# Altium PCB WiFi-GPRS_Combo.PcbDoc (part 1 of 2)
Units mm, origin at the board's own origin, x right, y up, seen from the top; angles counter-clockwise.
Board outline 65 x 50 mm, 2 copper layers (Top Layer, Bottom Layer); 80 components, 60 nets, 371 pads, 8 vias.
Unrouted connection lines stored in the file: 169.
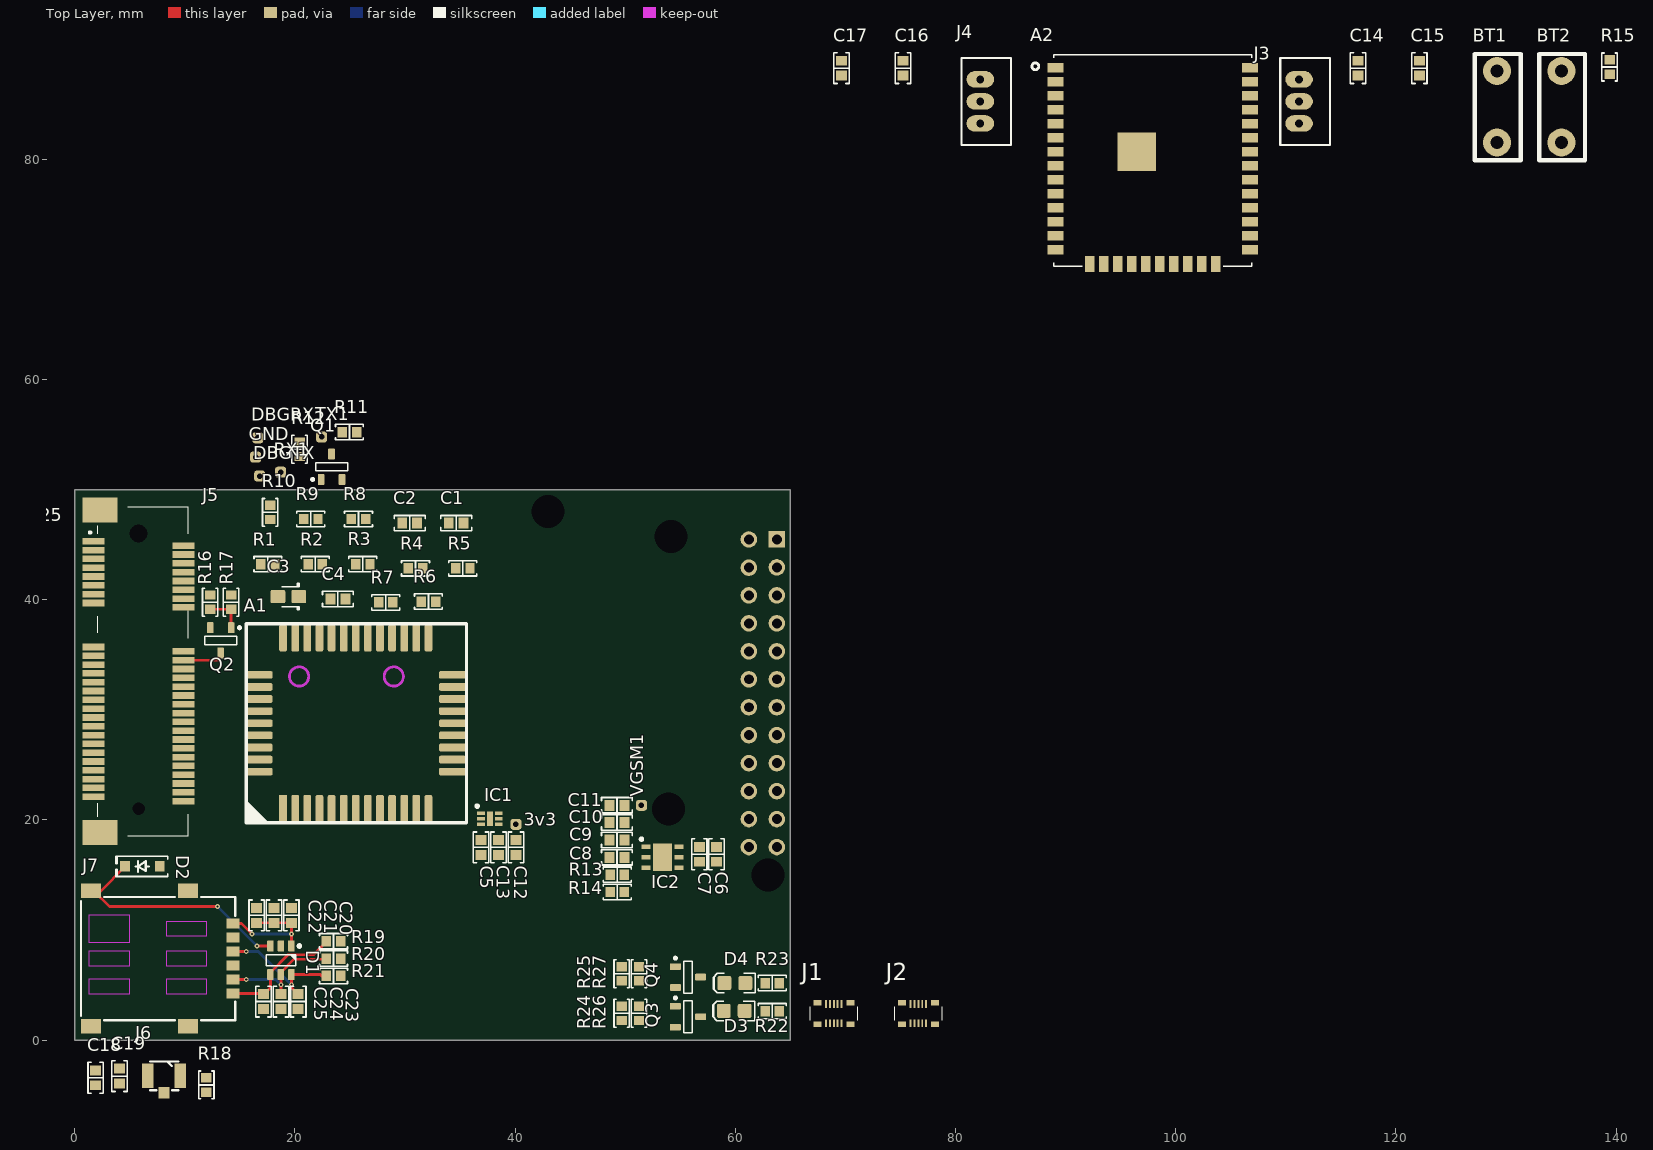
[diagram p0: Top Layer view]
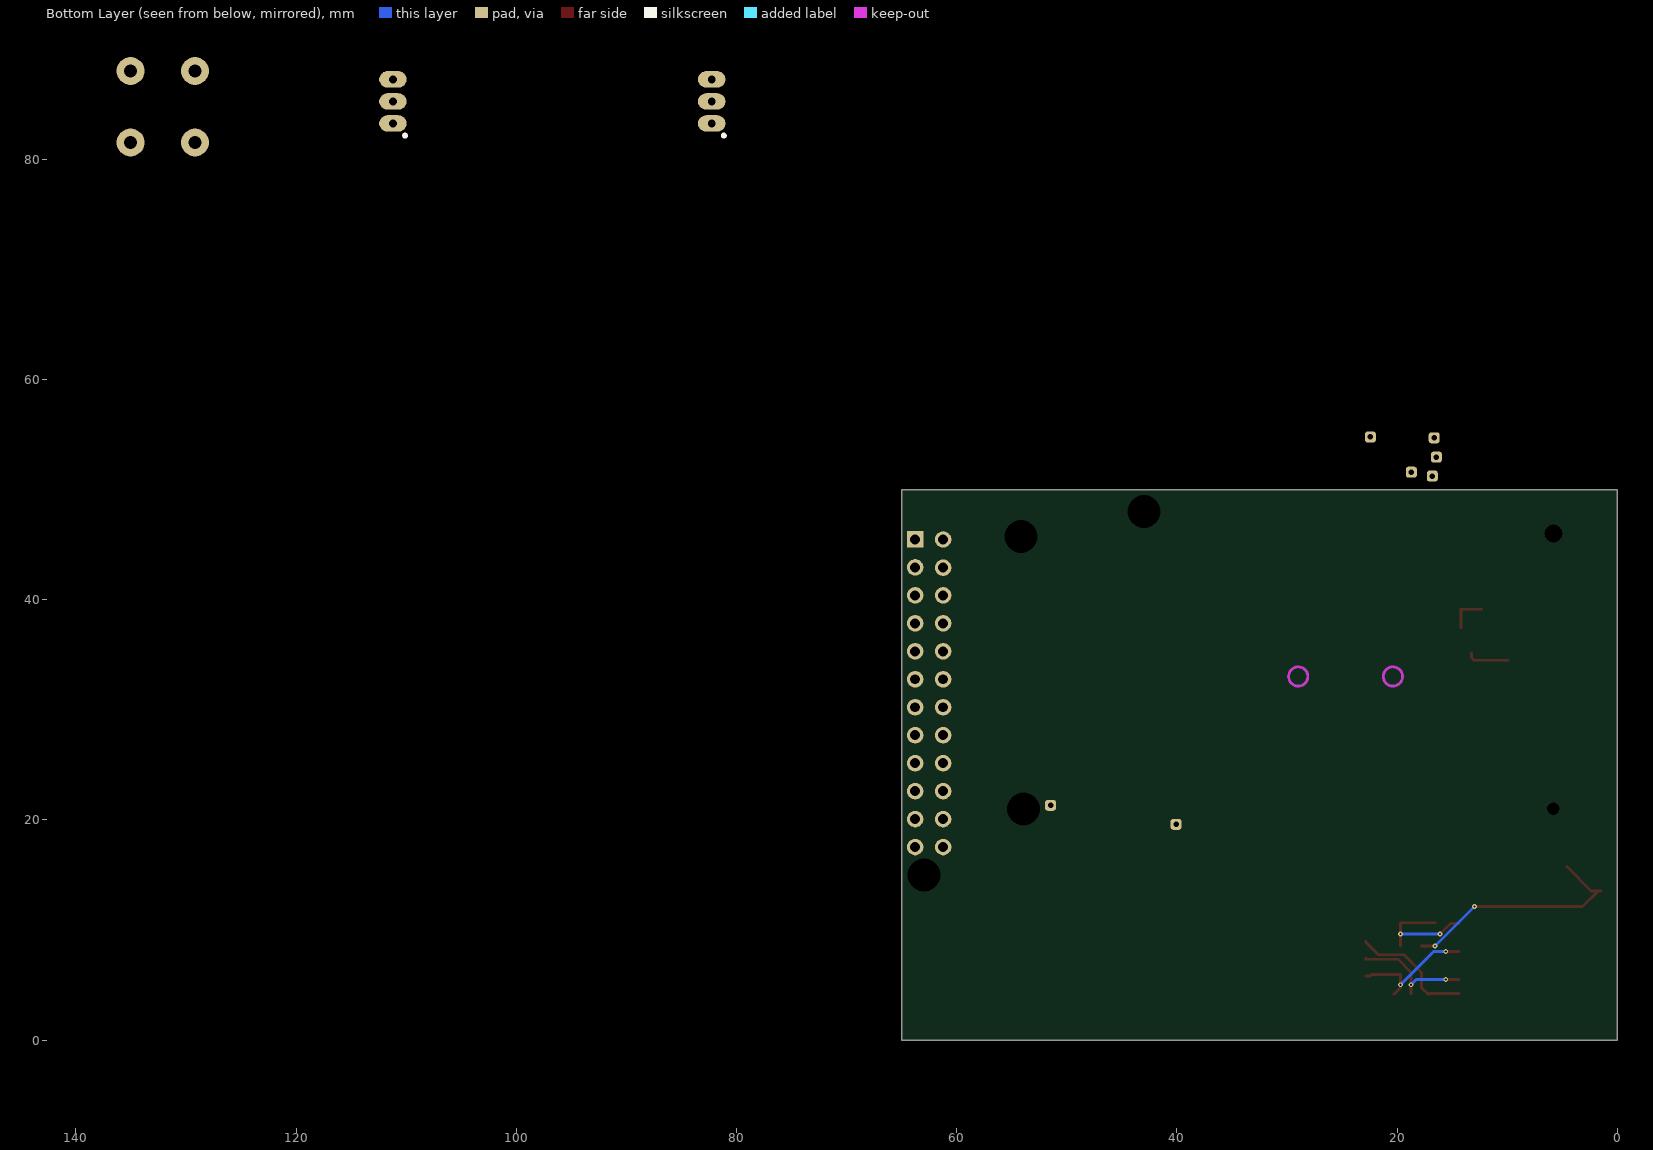
[diagram p1: Bottom Layer view, seen from below]

## Layer stack, top to bottom
Top Solder: solder mask 0.0102, Solder Resist, Dk 3.5
Top Layer: signal copper 0.0356
Dielectric 1: dielectric 0.32, FR-4, Dk 4.8
Bottom Layer: signal copper 0.0356
Bottom Solder: solder mask 0.0102, Solder Resist, Dk 3.5

## Board outline
0,0 65,0 65,50 0,50

## Design rules (kind name [scope] priority, off if disabled: settings)
Clearance [All] p1: gap=0.089 ignorepadtopadclearanceinfootprint=FALSE
Height [All] p1: minheight=0 maxheight=25.4 prefheight=0
PolygonConnect [All] p1: connectstyle=Relief reliefconductorwidth=0.254 reliefentries=4 polygonreliefangle="90 Angle" airgapwidth=0.254
RoomDefinition U_Expansition [InComponentClass('U_Expansition')] p1: confinementstyle=ConfineIn formatcopy=TRUE lockcomponents=FALSE outline 65.6,0 79.976,0 79.976,7.35 65.6,7.35
RoomDefinition U_WiFi-BLE [InComponentClass('U_WiFi-BLE')] p2: confinementstyle=ConfineIn formatcopy=TRUE lockcomponents=FALSE outline 68.722,69.324 143.076,69.324 143.076,92.45 68.722,92.45
RoomDefinition U_SimCard [InComponentClass('U_SimCard')] p3: confinementstyle=ConfineIn formatcopy=TRUE lockcomponents=FALSE outline 0,0.025 65,0.025 65,17.35 0,17.35
RoomDefinition U_Power [InComponentClass('U_Power')] p4: confinementstyle=ConfineIn formatcopy=TRUE lockcomponents=FALSE outline 35.373,12.45 61.23,12.45 61.23,22.675 35.373,22.675
RoomDefinition U_LTE [InComponentClass('U_LTE')] p5: confinementstyle=ConfineIn formatcopy=TRUE lockcomponents=FALSE outline 0.075,17.025 15.3,17.025 15.3,57.875 0.075,57.875
RoomDefinition U_GPRS [InComponentClass('U_GPRS')] p6: confinementstyle=ConfineIn formatcopy=TRUE lockcomponents=FALSE outline 15.3,17.925 41.325,17.925 41.325,56.225 15.3,56.225
RoutingVias [All] p1: holewidth=0.711 width=1.27 viastyle="Through Hole" minholewidth=0.711 minwidth=1.27 maxholewidth=0.711 maxwidth=1.27
SolderMaskExpansion [All] p1: expansion=0.102
Width "Schematic Width Constraint" [InNet('Vgsm')] p1: maxlimit=3 minlimit=0.5 preferedwidth=0.5
Width [All] p2: maxlimit=0.254 minlimit=0.254 preferedwidth=0.254
29 further rules are at their usual default settings.

## Classes and differential pairs
component class U_SimCard: C18 C19 C20 C21 C22 C23 C24 C25 D1 D2 D3 D4 J6 J7 Q3 Q4 R18 R19 R20 R21 R22 R23 R24 R25 R26 R27
component class U_LTE: J5 Q2 R16 R17
net class Vgsm: Vgsm
net class "SIM CARD": CLK DATA RST SIM_CLK SIM_DATA SIM_RST SIMVCC
net class "GSM ANT": ANT NetC19_2
component class U_WiFi-BLE: A2 BT1 BT2 C14 C15 C16 C17 J3 J4 R15
component class U_Power: 3v3 C5 C6 C7 C8 C9 C10 C11 C12 C13 IC1 IC2 R13 R14 VGSM1
component class U_GPRS: A1 C1 C2 C3 C4 DBGRX DBGTX GND Q1 R1 R2 R3 R4 R5 R6 R7 R8 R9 R10 R11 R12 RX1 TX1
component class U_Expansition: J1 J2

## Components (designator, comment, footprint, x,y, rotation, side; value= is the part's Value field where it differs from the comment)
3v3 "Test Point" TestPoint 40.075,19.6 r90 top
A1 "#NAME?" "QUECTEL - M66" 25.525,28.775 r90 top
A2 "ESP32-WROOM-32U(16MB)" ESP32-WROOM-32U 97.898,79.9 r0 top
BT1 "#NAME?" "TACT-SWITCH-BUTTON 2 PIN" 129.175,84.775 r0 top value=Button
BT2 "#NAME?" "TACT-SWITCH-BUTTON 2 PIN" 135.025,84.775 r0 top value=Button
C1 "10pF" "CAP 0603/1608" 34.649,46.95 r180 top
C2 "33pF" "CAP 0603/1608" 30.423,46.95 r180 top
C3 "100uF" "CAP POL 2012X150USR" 19.4,40.275 r180 top
C4 "100nF" "CAP 0603/1608" 23.9,40.05 r180 top
C5 "1uF" "CAP 0603/1608" 36.9,17.5 r90 top
C6 "10uF" "CAP 0603/1608" 58.3,16.875 r90 top
C7 "10uF" "CAP 0603/1608" 56.725,16.875 r90 top
C8 "470nF" "CAP 0603/1608" 49.25,16.6 r0 top
C9 "10uF" "CAP 0603/1608" 49.25,18.175 r0 top
C10 "22uF" "CAP 0603/1608" 49.25,19.75 r0 top
C11 "22uF" "CAP 0603/1608" 49.25,21.325 r0 top
C12 "100nF" "CAP 0603/1608" 40.075,17.5 r90 top
C13 "1uF" "CAP 0603/1608" 38.5,17.5 r90 top
C14 "100nF" "CAP 0603/1608" 116.549,88.275 r90 top
C15 "100nF" "CAP 0603/1608" 122.125,88.275 r90 top
C16 "47uF" "CAP 0603/1608" 75.222,88.275 r90 top
C17 "100nF" "CAP 0603/1608" 69.647,88.275 r90 top
C18 "Capacitance" "CAP 0603/1608" 1.9,-3.425 r90 top
C19 "Capacitance" "CAP 0603/1608" 4.075,-3.275 r90 top
C20 "1uF" "CAP 0603/1608" 19.675,11.325 r270 top
C21 "33pF" "CAP 0603/1608" 18.1,11.325 r270 top
C22 "100nF" "CAP 0603/1608" 16.525,11.325 r270 top
C23 "33pF" "CAP 0603/1608" 20.3,3.5 r90 top
C24 "33pF" "CAP 0603/1608" 18.725,3.5 r90 top
C25 "33pF" "CAP 0603/1608" 17.15,3.5 r90 top
D1 "#NAME?" SOT23-6 18.725,7.25 r270 top
D2 "#NAME?" SOD-123 6.15,15.775 r180 top
D3 "#NAME?" LED-0805-A 59.9,2.65 r180 top
D4 "#NAME?" LED-0805-A 59.95,5.175 r180 top
DBGRX "Test Point" TestPoint 16.625,54.7 r90 top (schematic designator DBGRX1)
DBGTX "Test Point" TestPoint 16.8,51.225 r90 top (schematic designator DBGTX1)
GND "Test Point" TestPoint 16.423,52.95 r90 top (schematic designator GND1)
IC1 "#NAME?" "MICREL MLF-6 1.6x1.6MM" 37.7,20.1 r0 top
IC2 "#NAME?" "ST DFN-6 3x3mm" 53.375,16.6 r0 top
J1 "#NAME?" "HIROSE BM2410DP" 68.95,2.4 r0 top
J2 "#NAME?" "HIROSE BM2410DP" 76.625,2.4 r0 top
J3 "Header" "JST B3B-PH-K" 111.199,85.25 r90 top
J4 "Header" "JST B3B-PH-K" 82.248,85.25 r90 top
J5 "#NAME?" "TE 1775862-2" 5.8,33.5 r270 top
J6 "#NAME?" "TE C-1909763" 8.125,-3.25 r0 top
J7 "#NAME?" "GCT SIM8060-6-1-14-00-A" 7.575,7.4 r270 top
Q1 "#NAME?" SOT23-3 23.325,52.125 r0 top
Q2 "#NAME?" SOT23-3 13.25,36.25 r180 top
Q3 "#NAME?" SOT23-3 55.75,2.125 r270 top
Q4 "#NAME?" SOT23-3 55.75,5.725 r270 top
R1 "10kR" "RES 0603/1608" 17.545,43.225 r180 top
R2 "10kR" "RES 0603/1608" 21.845,43.225 r180 top
R3 "10kR" "RES 0603/1608" 26.171,43.225 r180 top
R4 "10kR" "RES 0603/1608" 30.946,42.85 r180 top
R5 "10kR" "RES 0603/1608" 35.246,42.85 r180 top
R6 "10kR" "RES 0603/1608" 32.125,39.825 r180 top
R7 "10kR" "RES 0603/1608" 28.25,39.75 r180 top
R8 "5.6kR" "RES 0603/1608" 25.773,47.325 r180 top
R9 "5.6kR" "RES 0603/1608" 21.448,47.325 r180 top
R10 "5.6kR" "RES 0603/1608" 17.748,47.925 r270 top
R11 "1kR" "RES 0603/1608" 24.95,55.225 r0 top
R12 "10kR" "RES 0603/1608" 20.425,53.65 r90 top
R13 "66.5kR" "RES 0603/1608" 49.275,15.025 r180 top
R14 "10kR" "RES 0603/1608" 49.275,13.45 r180 top
R15 "10kR" "RES 0603/1608" 139.4,88.375 r90 top
R16 "1kR" "RES 0603/1608" 12.3,39.775 r90 top
R17 "10kR" "RES 0603/1608" 14.2,39.775 r270 top
R18 "0mR" "RES 0603/1608" 11.95,-4.075 r90 top
R19 "22R" "RES 0603/1608" 23.5,8.975 r0 top
R20 "22R" "RES 0603/1608" 23.5,7.4 r0 top
R21 "22R" "RES 0603/1608" 23.5,5.825 r0 top
R22 "91R" "RES 0603/1608" 63.35,2.625 r0 top
R23 "91R" "RES 0603/1608" 63.35,5.175 r0 top
R24 "1kR" "RES 0603/1608" 49.675,2.425 r270 top
R25 "1kR" "RES 0603/1608" 49.675,6.025 r270 top
R26 "10kR" "RES 0603/1608" 51.25,2.425 r90 top
R27 "10kR" "RES 0603/1608" 51.25,6.025 r90 top
RX1 "Test Point" TestPoint 18.7,51.575 r90 top
TX1 "Test Point" TestPoint 22.425,54.775 r90 top
VGSM1 "Test Point" TestPoint 51.475,21.325 r90 top

## Footprints (in the part's own frame and the unit in brackets; to place one, negate y for a bottom-side part, rotate by r counter-clockwise, add the part's x,y. Pads: shape width x height; smd on the part's side, far side on the other; paste and mask are expansions set on the pad)
"CAP 0603/1608" [mm] "Chip Capacitor, 2-Leads, Body 1.60x0.80mm, IPC Medium Density"
  rect 0.9x1 smd: 1(-0.675,0) 2(0.675,0)
  silkscreen extent -1.4,-0.7 1.4,0.7, body extent -0.8,-0.41 0.8,0.41, height 0.82
"CAP POL 2012X150USR" [mm] "Molded body capacitor, Body 2.0x1.2mm, 0805, IPC Medium Density"
  round 0.254 on Mech14: 0(0,0)
  rrect25% 1.35x1.2 smd: 1(-0.95,0) 2(0.95,0)
  Top Layer pour cut-out: -0.4,0.8 0.4,0.8 0.4,-0.8 -0.4,-0.8
  silkscreen extent -1,-1.2 0.6,1.2, body extent -1.02,-0.67 1.03,0.68, height 1.5
ESP32-WROOM-32U [mm]
  rect 1.45x0.86 smd: 1(-8.83,8.41) 2(-8.83,7.14) 3(-8.83,5.87) 4(-8.83,4.6) 5(-8.83,3.33) 6(-8.83,2.06) 7(-8.83,0.79) 8(-8.83,-0.48) 9(-8.83,-1.75) 10(-8.83,-3.02) 11(-8.83,-4.29) 12(-8.83,-5.56) 13(-8.83,-6.83) 14(-8.83,-8.1) 25(8.83,-8.1) 26(8.83,-6.83) 27(8.83,-5.56) 28(8.83,-4.29) 29(8.83,-3.02) 30(8.83,-1.75) 31(8.83,-0.48) 32(8.83,0.79) 33(8.83,2.06) 34(8.83,3.33) 35(8.83,4.6) 36(8.83,5.87) 37(8.83,7.14) 38(8.83,8.41)
  rect 0.86x1.45 smd: 15(-5.715,-9.43) 16(-4.445,-9.43) 17(-3.175,-9.43) 18(-1.905,-9.43) 19(-0.635,-9.43) 20(0.635,-9.43) 21(1.905,-9.43) 22(3.175,-9.43) 23(4.445,-9.43) 24(5.715,-9.43)
  rect 3.5x3.5 smd: 39(-1.46,0.77)
  silkscreen extent -10.96,-9.6 9,9.6, body extent -9,-9.6 9,9.6, height 3.3
"GCT SIM8060-6-1-14-00-A" [mm] "6 Position Card Connector NANO SIM Surface Mount, Right Angle Gold"
  rect 0.9x1.2 smd: C1(-3.175,6.8) C2(-0.635,6.8) C3(1.905,6.8) C5(-1.905,6.8) C6(0.635,6.8) C7(3.175,6.8)
  rect 1.3x1.8 smd: S(-6.15,2.7) S(6.15,2.7) S(6.15,-6.1) SW(-6.15,-6.1)
  Top Layer keep-out region: -3.36,0.72 -2.06,0.72 -2.06,4.42 -3.36,4.42
  Top Layer keep-out region: -0.65,0.72 0.65,0.72 0.65,4.42 -0.65,4.42
  Top Layer keep-out region: 1.89,0.72 3.19,0.72 3.19,4.42 1.89,4.42
  Top Layer keep-out region: 1.89,-6.3 3.19,-6.3 3.19,-2.6 1.89,-2.6
  Top Layer keep-out region: -0.65,-6.3 0.65,-6.3 0.65,-2.6 -0.65,-2.6
  Top Layer keep-out region: -3.93,-6.3 -1.49,-6.3 -1.49,-2.6 -3.93,-2.6
  silkscreen extent -5.6,-7 5.6,7, body extent -6.2,-7 6.2,7.1, height 1.4
"HIROSE BM2410DP" [mm]
  rect 0.18x0.69 smd: 1(-0.7,-0.875) 2(-0.7,0.875) 3(-0.35,-0.875) 4(-0.35,0.875) 5(0,-0.875) 6(0,0.875) 7(0.35,-0.875) 8(0.35,0.875) 9(0.7,-0.875) 10(0.7,0.875)
  rect 0.73x0.49 smd: MP1(-1.5,-0.975) MP2(-1.5,0.975) MP3(1.5,-0.975) MP4(1.5,0.975)
  silkscreen extent -2.16,-0.61 2.16,0.61, body extent -2.16,-1.02 2.16,1, height 0.64
"JST B3B-PH-K" [mm]
  oval 1.5x2.5 hole 0.7: 1(-2,0) 2(0,0) 3(2,0)
  silkscreen extent -3.95,-2.8 3.95,1.7, body extent -3.95,-2.8 3.95,1.7, height 6
LED-0805-A [mil]
  round 20 on Mech14: 0(0,0)
  rrect25% 50x50 smd: A(-37.5,0) K(37.5,0)
  Top Layer pour cut-out: -15,30 15,30 15,-30 -15,-30
  silkscreen extent -72,-35 77,35, body extent -39,-25 39,25, height 31
"MICREL MLF-6 1.6x1.6MM" [mm] "6-UFDFN Exposed Pad, 6-TMLF®"
  rect 0.7x0.3 smd: 1(-0.8,0.5) 2(-0.8,0) 3(-0.8,-0.5) 4(0.8,-0.5) 5(0.8,0) 6(0.8,0.5)
  rect 0.55x1.31 smd: 7(0,0)
  silkscreen extent -1.27,1.03 -1.02,1.27, body extent -0.85,-0.8 0.85,0.8, height 0.6
"QUECTEL - M66" [mm]
  rect 2.5x0.7 smd: 1(-7.75,6.6)
  rrect50% 2.5x0.7 smd: 2(-7.75,5.5) 3(-7.75,4.4) 4(-7.75,3.3) 5(-7.75,2.2) 6(-7.75,1.1) 7(-7.75,0) 8(-7.75,-1.1) 9(-7.75,-2.2) 10(-7.75,-3.3) 11(-7.75,-4.4) 12(-7.75,-5.5) 13(-7.75,-6.6) 23(7.75,-6.6) 24(7.75,-5.5) 25(7.75,-4.4) 26(7.75,-3.3) 27(7.75,-2.2) 28(7.75,-1.1) 29(7.75,0) 30(7.75,1.1) 31(7.75,2.2) 32(7.75,3.3) 33(7.75,4.4) 34(7.75,5.5) 35(7.75,6.6)
  rrect50% 0.7x2.5 smd: 14(-4.4,-8.8) 15(-3.3,-8.8) 16(-2.2,-8.8) 17(-1.1,-8.8) 18(0,-8.8) 19(1.1,-8.8) 20(2.2,-8.8) 21(3.3,-8.8) 22(4.4,-8.8) 36(4.4,8.8) 37(3.3,8.8) 38(2.2,8.8) 39(1.1,8.8) 40(0,8.8) 41(-1.1,8.8) 42(-2.2,8.8) 43(-3.3,8.8) 44(-4.4,8.8)
  Keep-Out Layer circle w0.254: c4.25,-3.45 r0.875
  Keep-Out Layer circle w0.254: c4.25,5.15 r0.875
  silkscreen extent -9.05,-10.05 9.05,9.95, body extent -7.9,-8.8 7.9,8.9, height 2.3
"RES 0603/1608" [mm] "Chip Resistor, 2-Leads, Body 1.60x0.80mm, IPC Medium Density"
  rect 0.85x0.95 smd: 1(-0.65,0) 2(0.65,0)
  silkscreen extent -1.27,-0.7 1.27,0.7, body extent -0.8,-0.4 0.8,0.4, height 0.45
SOD-123 [mm] "SOD, 2-Leads, Body 1.55x3.70mm, IPC Medium Density"
  rect 0.9x0.95 smd: 1(-1.575,0) 2(1.575,0)
  silkscreen extent -2.3,-0.92 2.41,0.92, body extent -1.86,-0.78 1.86,0.77, height 1.35
SOT23-3 [mm] "SOT23, 3 pin"
  rrect25% 0.6x1 smd: 1(-0.95,-1.2) 2(0.95,-1.2) 3(0,1.1)
  silkscreen extent -1.81,-1.3 1.45,0.33, body extent -1.45,-1.45 1.45,1.35, height 1.29
SOT23-6 [mm]
  round 0.5 on Mech14: 0(0,0)
  rrect25% 1x0.6 smd: 1(-1.3,0.95) 2(-1.3,0) 3(-1.3,-0.95) 4(1.3,-0.95) 5(1.3,0) 6(1.3,0.95)
  silkscreen extent -1.42,-1.35 0.51,1.81, body extent -1.4,-1.45 1.4,1.45, height 1.44
"ST DFN-6 3x3mm" [mm] "DFN6 (3 x 3 mm)"
  rect 0.8x0.4 smd: 1(-1.5,0.95) 2(-1.5,0) 3(-1.5,-0.95) 4(1.5,-0.95) 5(1.5,0) 6(1.5,0.95)
  rect 1.75x2.5 smd: 7(0,0)
  silkscreen extent -2.02,1.53 -1.77,1.77, body extent -1.55,-1.5 1.55,1.5, height 1
"TACT-SWITCH-BUTTON 2 PIN" [mm]
  round 2.54 / inner round 1.2 / far side round 2.54 hole 1.2: 1(0,-3.25) 2(0,3.25)
  silkscreen extent -2.02,-4.86 2.15,4.79, body extent -1.4,-3.1 1.6,2.9, height 4.26
"TE 1775862-2" [mm] "PCI-E MINI CARD CONNECTOR"
  rect 0.6x2 smd: 1(-11.8,-4.1) 2(-11.4,4.1) 3(-11,-4.1) 4(-10.6,4.1) 5(-10.2,-4.1) 6(-9.8,4.1) 7(-9.4,-4.1) 8(-9,4.1) 9(-8.6,-4.1) 10(-8.2,4.1) 11(-7.8,-4.1) 12(-7.4,4.1) 13(-7,-4.1) 14(-6.6,4.1) 15(-6.2,-4.1) 16(-5.8,4.1) 17(-2.2,-4.1) 18(-1.8,4.1) 19(-1.4,-4.1) 20(-1,4.1) 21(-0.6,-4.1) 22(-0.2,4.1) 23(0.2,-4.1) 24(0.6,4.1) 25(1,-4.1) 26(1.4,4.1) 27(1.8,-4.1) 28(2.2,4.1) 29(2.6,-4.1) 30(3,4.1) 31(3.4,-4.1) 32(3.8,4.1) 33(4.2,-4.1) 34(4.6,4.1) 35(5,-4.1) 36(5.4,4.1) 37(5.8,-4.1) 38(6.2,4.1) 39(6.6,-4.1) 40(7,4.1) 41(7.4,-4.1) 42(7.8,4.1) 43(8.2,-4.1) 44(8.6,4.1) 45(9,-4.1) 46(9.4,4.1) 47(9.8,-4.1) 48(10.2,4.1) 49(10.6,-4.1) 50(11,4.1) 51(11.4,-4.1) 52(11.8,4.1)
  round 0.825 hole 1.65: MH1(-12.5,0)
  round 0.575 hole 1.15: MH2(12.5,0)
  rect 2.3x3.2 smd: MP1(-14.65,-3.5) MP2(14.65,-3.5)
  silkscreen extent -14.95,-4.5 14.95,4.5, body extent -14.87,-4.5 15.02,4.58, height 5.19
"TE C-1909763" [mm]
  rect 1.05x2.2 smd: G(-1.475,0) G(1.475,0)
  rect 1x1.05 smd: S(0,-1.525)
  silkscreen extent -1.3,-1.3 1.3,1.3, body extent -1.5,-1.55 1.5,1.55, height 1.23
TestPoint [mm] "Custom Test Point"
  rrect50% 1x1 hole 0.5: 1(0,0)

## Part data
3v3 DBGRX DBGTX GND RX1 TX1 VGSM1: "Custom Test Point"
A1: library part "Qectel M66", "GSM/GPRS Module Series", Case/Package=Module, Current - Receiving=350mA, Frequency="824MHz ~ 960MHz, 1.71GHz ~ 1.99GHz", Manufacturer=QUECTEL, Manufacturer Part Number=M66, Operating Temperature="40°C ~ 85°C", Power - Output=32.2dBm, Supplier Part Number 1=M66DSFA-04-STD, Voltage - Supply=3.8V, Antenna Type="Antenna Not Included", ComponentLink1Description=https://www.u-blox.com/sites/default/files/SARA-G3_DataSheet_%28UBX-13000993%29.pdf?src-supplier=Digi-Key, ComponentLink1URL=https://www.u-blox.com/sites/default/files/SARA-G3_DataSheet_%28UBX-13000993%29.pdf?src-supplier=Digi-Key, Current - Transmitting=350mA, Data Rate=85.6kbps, Pricing 1="1 = 6,27 (USD)", Protocol="2G GPRS, GSM", RF Family/Standard="Cellular, Navigation", RoHS=No, Sensitivity=-109dBm, Serial Interfaces=UART, Stock 1=1144, Supplier 1=empa
A2: library part "ESP ESP32-WROOM-32U", "Wi-Fi/BT BLE Module ESP32-D0WD SPI Flash UART U.FL Conn.", Manufacturer="Espressif Systems", Supplier Part Number 1=1904-1028-1-ND, ComponentLink1Description=https://www.espressif.com/sites/default/files/documentation/esp32-wroom-32d_esp32-wroom-32u_datasheet_en.pdf?src-supplier=Digi-Key, ComponentLink1URL=https://www.espressif.com/sites/default/files/documentation/esp32-wroom-32d_esp32-wroom-32u_datasheet_en.pdf?src-supplier=Digi-Key, Manufacturer Part Number=ESP32-WROOM-32U(16MB), Pricing 1="1 = 4,50000 (USD)", RoHS=No, Stock 1=37, Supplier 1=Digi-Key
BT1 BT2: library part "Tactile Switch", "Button, 2 pin", Birim Fiyat="* USD", Depo Kodu=SW#BUTTON, Satýcý=Digikey
C1: library part "Capacitor - Ceramic", "Ceramic, SMT Capacitor", Case/Package=0603, Case Code (Metric)=1608, Dielectric=C0G, Insulation Resistance=100GR, Manufacturer=Yageo, Manufacturer Part Number=CC0603JRNPO9BN100, Max Operating Temperature=125°C, Min Operating Temperature=-55°C, Package Quantity=1, Supplier Part Number 1=311-1058-1-ND, Temperature Coefficient=30ppm/°C, Tolerance=5%, Voltage=50V, Capacitance=10pF, Case Code (Imperial)=0603, ComponentLink1Description=http://www.farnell.com/datasheets/2213336.pdf?src-supplier=Farnell, ComponentLink1URL=http://www.farnell.com/datasheets/2213336.pdf?src-supplier=Farnell, ComponentLink2Description=https://www.verical.com/server-webapp/html/getDatasheet?partID=403524&src-supplier=Verical, ComponentLink2URL=https://www.verical.com/server-webapp/html/getDatasheet?partID=403524&src-supplier=Verical, ComponentLink3Description=http://www.farnell.com/datasheets/1835847.pdf?src-supplier=Element14, ComponentLink3URL=http://www.farnell.com/datasheets/1835847.pdf?src-supplier=Element14, ComponentLink4Description=http://www.yageo.com/documents/recent/UPY-GP_NP0_16V-to-50V_16.pdf?src-supplier=Digi-Key, ComponentLink4URL=http://www.yageo.com/documents/recent/UPY-GP_NP0_16V-to-50V_16.pdf?src-supplier=Digi-Key, ComponentLink5Description=http://www.farnell.com/datasheets/1734582.pdf?src-supplier=Element14, ComponentLink5URL=http://www.farnell.com/datasheets/1734582.pdf?src-supplier=Element14, ComponentLink6Description=http://www.yageo.com/documents/recent/UPY-GP_NP0_16V-to-50V_8.pdf?src-supplier=Avnet+Europe, ComponentLink6URL=http://www.yageo.com/documents/recent/UPY-GP_NP0_16V-to-50V_8.pdf?src-supplier=Avnet+Europe, ComponentLink7Description=http://www.mouser.com/ds/2/447/Yageo_UPY-GP_NP0_16V-to-50V_9-358835.pdf?src-supplier=Mouser, ComponentLink7URL=http://www.mouser.com/ds/2/447/Yageo_UPY-GP_NP0_16V-to-50V_9-358835.pdf?src-supplier=Mouser, ComponentLink8Description=http://www.farnell.com/datasheets/1132289.pdf?src-supplier=Element14, ComponentLink8URL=http://www.farnell.com/datasheets/1132289.pdf?src-supplier=Element14, Composition=Ceramic, Depth=0.8mm, Height=0.8mm, Lead Free="Lead Free", Length=1.6mm, Mount="Surface Mount", Number of Pins=2, Packaging="Tape and Reel", Pricing 1="1 = 0,10000, 10 = 0,06100, 100 = 0,02730, 500 = 0,01948, 1000 = 0,01530 (USD)", Radiation Hardening=No, REACH SVHC="No SVHC", RoHS=Yes, Stock 1=128799, Supplier 1=Digi-Key, Termination=SMD/SMT, Thickness=0.035inch, Voltage Rating=50V, Voltage Rating (DC)=50V, Width=0.031inch
C2 C21 C23 C24 C25: library part "Capacitor - Ceramic", "Ceramic, SMT Capacitor", Case/Package=Ceramic, Case Code (Imperial)=0603, Case Code (Metric)=1608, Dielectric=C0G, Manufacturer="Walsin Technologies", Manufacturer Part Number=0603N330J500CT, Max Operating Temperature=125°C, Min Operating Temperature=-55°C, Supplier Part Number 1=1292-1645-1-ND, Tolerance=5%, Voltage Rating=50V, Capacitance=33pF, ComponentLink1Description=https://www.verical.com/server-webapp/html/getDatasheet?partID=572322&src-supplier=Verical, ComponentLink1URL=https://www.verical.com/server-webapp/html/getDatasheet?partID=572322&src-supplier=Verical, Depth=0.8mm, Lead Free="Lead Free", Length=1.6mm, Packaging="Tape and Reel", Pricing 1="1 = 0,10000, 10 = 0,03300, 100 = 0,01490, 500 = 0,01062, 1000 = 0,00835 (USD)", Radiation Hardening=No, REACH SVHC=Unknown, RoHS=Yes, Stock 1=411190, Supplier 1=Digi-Key, Voltage Rating (DC)=50V
C3: library part "Capacitor - Tantalum", "Capacitor, Tantalum", Case/Package=1210, Case Code (Metric)=3528, Dielectric Material=Tantalum, ESR (Equivalent Series Resistance)=250mR, Manufacturer="Kyocera AVX", Manufacturer Part Number=TPSB107M006R0250, Max Operating Temperature=125°C, Min Operating Temperature=-55°C, Package Quantity=1, Supplier Part Number 1=478-4978-1-ND, Tolerance=20%, Voltage Rating=6.3V, Capacitance=100uF, Case Code (Imperial)=1210, ComponentLink1Description=http://datasheets.avx.com/TPS.pdf?src-supplier=Digi-Key, ComponentLink1URL=http://datasheets.avx.com/TPS.pdf?src-supplier=Digi-Key, ComponentLink2Description=http://www.avx.com/docs/catalogs/tps.pdf?src-supplier=Avnet, ComponentLink2URL=http://www.avx.com/docs/catalogs/tps.pdf?src-supplier=Avnet, ComponentLink3Description=http://www.avxcorp.com/docs/Catalogs/tps.pdf?src-supplier=Future+Electronics, ComponentLink3URL=http://www.avxcorp.com/docs/Catalogs/tps.pdf?src-supplier=Future+Electronics, ComponentLink4Description=http://www.avx.com/docs/catalogs/tps.pdf?src-supplier=Avnet+Europe, ComponentLink4URL=http://www.avx.com/docs/catalogs/tps.pdf?src-supplier=Avnet+Europe, Depth=2.8mm, Dissipation Factor=10%, Features="General Purpose", Height=2.1mm, Height - Seated (Max)=0.083inch, Lead Free="Lead Free", Length=3.5mm, Mount="Surface Mount", Number of Pins=2, Packaging="Tape and Reel", Polarity=Polar, Pricing 1="1 = 0,65000, 10 = 0,47900, 100 = 0,32840, 500 = 0,25996, 1000 = 0,21891 (USD)", Radiation Hardening=No, RoHS=Yes, Stock 1=22431, Supplier 1=Digi-Key, Termination=SMD/SMT, Voltage Rating (DC)=6.3V, Width=2.8mm
C4 C12 C14 C15 C17 C22: library part "Cap - Ceramic", "Capacitor, Ceramic", Case/Package=0603, Case Code (Metric)=1608, Dielectric=X5R, Manufacturer=Samsung, Manufacturer Part Number=CL10A104KA8NNNC, Max Operating Temperature=85°C, Min Operating Temperature=-55°C, Package Quantity=1, Supplier Part Number 1=1276-1857-1-ND, Tolerance=10%, Voltage Rating=25V, Capacitance=100nF, Case Code (Imperial)=0603, ComponentLink1Description=http://www.samsungsem.com/kr/support/library/product-catalog/mlcc.jsp, ComponentLink1URL=http://www.samsungsem.com/kr/support/library/product-catalog/mlcc.jsp, Contact Plating=Tin, Lead Free="Lead Free", Length=0.063inch, Mount="Surface Mount", Packaging="Tape and Reel", Price=0,1, Pricing 1="1 = 0,10000, 10 = 0,04600, 100 = 0,02070, 500 = 0,01478, 1000 = 0,01162 (USD)", RoHS=Yes, Stock 1=978306, Supplier 1=Digi-Key, Termination=Wraparound, Thickness=0.035inch, Voltage Rating (DC)=25V, Width=0.031inch
C5 C13 C20: library part "Capacitor - Ceramic", "Ceramic, SMT Capacitor", Case/Package=0603, Case Code (Metric)=1608, Dielectric=X5R, Manufacturer=Samsung, Manufacturer Part Number=CL10A105KP8NNNC, Max Operating Temperature=85°C, Min Operating Temperature=-55°C, Package Quantity=1, Supplier Part Number 1=1276-1182-1-ND, Tolerance=10%, Voltage=10V, Capacitance=1uF, Case Code (Imperial)=0603, ComponentLink1Description=https://datasheet.ciiva.com/15195/getdatasheetpartid-358616-15195708.pdf?src-supplier=Verical, ComponentLink1URL=https://datasheet.ciiva.com/15195/getdatasheetpartid-358616-15195708.pdf?src-supplier=Verical, ComponentLink2Description=https://datasheet.ciiva.com/16358/cl05b104kq5nnnc-16358431.pdf?src-supplier=Future+Electronics, ComponentLink2URL=https://datasheet.ciiva.com/16358/cl05b104kq5nnnc-16358431.pdf?src-supplier=Future+Electronics, Contact Plating=Tin, Depth=0.8mm, Height=0.8mm, Length=1.6mm, Mount="Surface Mount", Packaging="Tape and Reel", Pricing 1="1 = 0,10000, 10 = 0,03800, 100 = 0,01680, 500 = 0,01200, 1000 = 0,00943 (USD)", Radiation Hardening=No, RoHS=Yes, Stock 1=4590831, Supplier 1=Digi-Key, Thickness=0.035inch, Voltage Rating=10V, Width=0.031inch
C6 C7 C9: library part "Capacitor - Ceramic", "Ceramic, SMT Capacitor", Case/Package=0603, Case Code (Metric)=1608, Dielectric=X5R, Manufacturer=Samsung, Manufacturer Part Number=CL10A106MQ8NNNC, Max Operating Temperature=85°C, Min Operating Temperature=-55°C, Package Quantity=1, Supplier Part Number 1=1276-1119-1-ND, Tolerance=20%, Voltage=6.3V, Capacitance=10uF, Case Code (Imperial)=0603, ComponentLink1Description=https://datasheet.ciiva.com/25798/cl10a106mq8nnnc-25798320.pdf?src-supplier=Digi-Key, ComponentLink1URL=https://datasheet.ciiva.com/25798/cl10a106mq8nnnc-25798320.pdf?src-supplier=Digi-Key, ComponentLink2Description=https://datasheet.ciiva.com/26838/getdatasheetpartid-357557-26838347.pdf?src-supplier=Verical, ComponentLink2URL=https://datasheet.ciiva.com/26838/getdatasheetpartid-357557-26838347.pdf?src-supplier=Verical, ComponentLink3Description=https://datasheet.ciiva.com/16437/cl05b104kq5nnnc-16437327.pdf?src-supplier=Future+Electronics, ComponentLink3URL=https://datasheet.ciiva.com/16437/cl05b104kq5nnnc-16437327.pdf?src-supplier=Future+Electronics, Contact Plating=Tin, Depth=0.8mm, Height=0.8mm, Length=1.6mm, Mount="Surface Mount", Packaging="Tape and Reel", Pricing 1="1 = 0,15000, 10 = 0,11000, 100 = 0,05150, 500 = 0,03614, 1000 = 0,02992 (USD)", Radiation Hardening=No, RoHS=Yes, Stock 1=4408315, Supplier 1=Digi-Key, Thickness=0.035inch, Voltage Rating=6.3V, Width=0.031inch
C8: library part "Capacitor - Ceramic", "Ceramic, SMT Capacitor", Case/Package=0603, Case Code (Metric)=1608, Manufacturer="Wurth Electronics", Manufacturer Part Number=885012106020, Max Operating Temperature=85°C, Min Operating Temperature=-55°C, Supplier Part Number 1=732-7917-1-ND, Tolerance=20%, Voltage Rating=25V, Capacitance=470nF, Case Code (Imperial)=0603, ComponentLink1Description=https://datasheet.ciiva.com/25798/cl10a106mq8nnnc-25798320.pdf?src-supplier=Digi-Key, ComponentLink1URL=https://datasheet.ciiva.com/25798/cl10a106mq8nnnc-25798320.pdf?src-supplier=Digi-Key, ComponentLink2Description=https://datasheet.ciiva.com/26838/getdatasheetpartid-357557-26838347.pdf?src-supplier=Verical, ComponentLink2URL=https://datasheet.ciiva.com/26838/getdatasheetpartid-357557-26838347.pdf?src-supplier=Verical, ComponentLink3Description=https://datasheet.ciiva.com/16437/cl05b104kq5nnnc-16437327.pdf?src-supplier=Future+Electronics, ComponentLink3URL=https://datasheet.ciiva.com/16437/cl05b104kq5nnnc-16437327.pdf?src-supplier=Future+Electronics, ComponentLink4Description=http://www.farnell.com/datasheets/2031761.pdf?src-supplier=Farnell, ComponentLink4URL=http://www.farnell.com/datasheets/2031761.pdf?src-supplier=Farnell, ComponentLink5Description=https://katalog.we-online.de/pbs/datasheet/885012106020.pdf?src-supplier=Digi-Key, ComponentLink5URL=https://katalog.we-online.de/pbs/datasheet/885012106020.pdf?src-supplier=Digi-Key, ComponentLink6Description=http://www.farnell.com/datasheets/2031761.pdf?src-supplier=Newark, ComponentLink6URL=http://www.farnell.com/datasheets/2031761.pdf?src-supplier=Newark, Length=0.063inch, Mount="Surface Mount", Packaging="Tape and Reel", Pricing 1="1 = 0,10000, 10 = 0,06700, 100 = 0,06040, 500 = 0,05346 (USD)", RoHS=Yes, Stock 1=4756, Supplier 1=Digi-Key, Thickness=0.037inch, Width=0.031inch
C10 C11: library part "Capacitor - Ceramic", "Ceramic, SMT Capacitor", Case/Package=0603, Case Code (Metric)=1608, Dielectric=X5R, Manufacturer=Murata, Manufacturer Part Number=GRM188R60J226MEA0D, Max Operating Temperature=85°C, Min Operating Temperature=-55°C, Package Quantity=4000, Supplier Part Number 1=490-7611-1-ND, Tolerance=20%, Voltage Rating=6.3V, Capacitance=22uF, Case Code (Imperial)=0603, ComponentLink1Description=https://datasheet.ciiva.com/29540/partnumbering-e-01-29540443.pdf?src-supplier=Digi-Key, ComponentLink1URL=https://datasheet.ciiva.com/29540/partnumbering-e-01-29540443.pdf?src-supplier=Digi-Key, ComponentLink2Description=https://datasheet.ciiva.com/29540/partnumbering-e-01-29540441.pdf?src-supplier=Digi-Key, ComponentLink2URL=https://datasheet.ciiva.com/29540/partnumbering-e-01-29540441.pdf?src-supplier=Digi-Key, ComponentLink3Description=https://datasheet.ciiva.com/29540/partnumbering-e-01-29540442.pdf?src-supplier=Digi-Key, ComponentLink3URL=https://datasheet.ciiva.com/29540/partnumbering-e-01-29540442.pdf?src-supplier=Digi-Key, Depth=0.8mm, Height=0.8mm, Lead Free="Lead Free", Length=1.6mm, Mount="Surface Mount", Packaging="Tape and Reel", Pricing 1="1 = 0,26000, 10 = 0,17700, 100 = 0,10010, 500 = 0,07066, 1000 = 0,06182 (USD)", REACH SVHC="No SVHC", RoHS=Yes, Stock 1=6684673, Supplier 1=Digi-Key, Termination=SMD/SMT, Thickness=0.039inch, Voltage Rating (DC)=6.3V, Weight=0.000222oz, Width=0.8mm
C16: library part "Capacitor - Ceramic", "Ceramic, SMT Capacitor", Case/Package=1210, Dielectric=X6S, Manufacturer=Murata, Manufacturer Part Number=GRM32EC81C476KE15K, Supplier Part Number 1=490-16309-1-ND, Tolerance=10%, Voltage Rating (DC)=16V, Capacitance=47uF, ComponentLink1Description=http://www.samsungsem.com/kr/support/product-search/mlcc/CL10A475KO8NNNC.jsp, ComponentLink1URL=http://www.samsungsem.com/kr/support/product-search/mlcc/CL10A475KO8NNNC.jsp, ComponentLink2Description=https://www.verical.com/server-webapp/html/getDatasheet?partID=358619, ComponentLink2URL=https://www.verical.com/server-webapp/html/getDatasheet?partID=358619, ComponentLink3Description=https://produktinfo.conrad.com/datenblaetter/450000-474999/457663-da-01-en-VS_KONDENSATOR_0603.pdf, ComponentLink3URL=https://produktinfo.conrad.com/datenblaetter/450000-474999/457663-da-01-en-VS_KONDENSATOR_0603.pdf, ComponentLink4Description=https://www.yuden.co.jp/productdata/catalog/mlcc01_e.pdf, ComponentLink4URL=https://www.yuden.co.jp/productdata/catalog/mlcc01_e.pdf, ComponentLink5Description=https://www.verical.com/server-webapp/html/getDatasheet?partID=637532, ComponentLink5URL=https://www.verical.com/server-webapp/html/getDatasheet?partID=637532, ComponentLink6Description=http://www.yuden.co.jp/ut/product/category/capacitor/EMK325BJ476MM-T.pdf, ComponentLink6URL=http://www.yuden.co.jp/ut/product/category/capacitor/EMK325BJ476MM-T.pdf, ComponentLink7Description=http://www.farnell.com/datasheets/1693457.pdf, ComponentLink7URL=http://www.farnell.com/datasheets/1693457.pdf, ComponentLink8Description=http://www.mouser.com/ds/2/396/mlcc_all_e-1149778.pdf, ComponentLink8URL=http://www.mouser.com/ds/2/396/mlcc_all_e-1149778.pdf, ComponentLink9Description=http://www.onlinecomponents.com/productFiles/mf-TAI/75emk325bj476mm-t.pdf, ComponentLink9URL=http://www.onlinecomponents.com/productFiles/mf-TAI/75emk325bj476mm-t.pdf, Length=3.2mm, Price=0,78, Pricing 1="1 = 0,78000, 10 = 0,57100, 100 = 0,39170, 500 = 0,31006, 1000 = 0,26110 (USD)", Stock 1=2282, Supplier 1=Digi-Key, Thickness=2.5mm, Width=2.5mm
C18 C19: library part "Capacitor - Ceramic", "Ceramic, SMT Capacitor"
D1: library part "TVS Array 5 ch", "Dual-line Transil™,  transient voltage suppressor (TVS)", Capacitance @ Frequency=-, Current - Peak Pulse (10/1000µs)="7A (8/20µs)", Manufacturer=STMicroelectronics, Manufacturer Part Number=ESDA6V1-5SC6Y, Operating Temperature="-40°C ~ 150°C (TJ)", Package / Case=SOT-23-6, Power - Peak Pulse=80W, Power Line Protection=No, Supplier Part Number 1=497-17311-1-ND, Voltage - Breakdown (Min)=6.1V, Voltage - Clamping (Max) @ Ipp=11.4V, Voltage - Reverse Standoff (Typ)=5.2V, Applications="General Purpose", Category="Circuit Protection", ComponentLink1Description=http://www.st.com/content/ccc/resource/technical/document/datasheet/group3/cf/58/f6/44/dc/90/4f/72/DM00342426/files/DM00342426.pdf/jcr:content/translations/en.DM00342426.pdf, ComponentLink1URL=http://www.st.com/content/ccc/resource/technical/document/datasheet/group3/cf/58/f6/44/dc/90/4f/72/DM00342426/files/DM00342426.pdf/jcr:content/translations/en.DM00342426.pdf, Mounting Type="Surface Mount", Packaging="Cut Tape (CT)", Part Status=Active, Pricing 1="1=0.37, 10=0.3, 100=0.2042, 500=0.15314, 1000=0.11486 (USD)", RoHS="RoHS Compliant", Stock 1=55, Supplier 1=Digi-Key, Supplier Device Package=SOT-23-6, Type=Zener
D2: library part DDZ9678-7, "DIODE ZENER 1.8V 500MW SOD123", Current - Reverse Leakage @ Vr="7.5µA @ 1V", Manufacturer="Diodes Incorporated", Operating Temperature="-65°C ~ 150°C", Package / Case=SOD-123, Power - Max=500mW, Supplier Part Number 1=DDZ9678DICT-ND, Tolerance=±5%, Voltage - Forward (Vf) (Max) @ If="900mV @ 10mA", Voltage - Zener (Nom) (Vz)=1.8V, ComponentLink1Description=Datasheet, ComponentLink1URL=https://www.diodes.com/assets/Datasheets/ds30410.pdf, ComponentLink2Description="DigiKey Link", ComponentLink2URL=http://digikey.com/product-detail/en/diodes-incorporated/DDZ9678-7/DDZ9678DICT-ND/1964750, LastUpdated="02.09.2020 01:19:27", Lifecycle Status=Active, Minimum Order=1, Mounting Type="Surface Mount", Packaging=TapeAndReel, PartId=1698, Part Number=DDZ9678-7, Part Status=Active, Price=0.06, Series=-, Supplier 1=DigiKey, Supplier Device Package=SOD-123
D3 D4: library part LED, "Smd Led", Case/Package=0805, Case Code (Metric)=2012, Color=Green, Forward Current=30mA, Forward Voltage=2V, Manufacturer="Wurth Electronics", Manufacturer Part Number=150080VS75000, Max Operating Temperature=85°C, Min Operating Temperature=-40°C, Package Quantity=4000, Supplier Part Number 1=732-4986-1-ND, Test Current=20mA, Case Code (Imperial)=0805, ComponentLink1Description=http://www.farnell.com/datasheets/1911352.pdf?src-supplier=Element14, ComponentLink1URL=http://www.farnell.com/datasheets/1911352.pdf?src-supplier=Element14, ComponentLink2Description=https://katalog.we-online.de/led/datasheet/150080VS75000.pdf?src-supplier=Digi-Key, ComponentLink2URL=https://katalog.we-online.de/led/datasheet/150080VS75000.pdf?src-supplier=Digi-Key, ComponentLink3Description=http://www.produktinfo.conrad.com/datenblaetter/750000-774999/759437-da-01-en-CHIPLED_0805_W_KL_H_GRUEN_150080VS7500.pdf?src-supplier=Conrad, ComponentLink3URL=http://www.produktinfo.conrad.com/datenblaetter/750000-774999/759437-da-01-en-CHIPLED_0805_W_KL_H_GRUEN_150080VS7500.pdf?src-supplier=Conrad, Dominant Wavelength=570nm, Height=0.7mm, Length=2mm, Lens Style=Clear,Rectangular, Luminous Intensity=40mcd, Mount="Surface Mount", Packaging="Tape and Reel", Pricing 1="1 = 0,17000, 50 = 0,16000, 100 = 0,13700, 500 = 0,11800 (USD)", REACH SVHC=Unknown, RoHS=Yes, Stock 1=73352, Supplier 1=Digi-Key, Viewing Angle=140°, Wavelength=570nm, Width=1.25mm
IC1: library part "MICROCHIP MIC5353", "Integrated Circuit", Manufacturer=Microchip, Manufacturer Part Number=MIC5353-3.3YMT-TR, Supplier Part Number 1=576-3680-1-ND, ComponentLink1Description=http://www.farnell.com/datasheets/2245202.pdf?src-supplier=Farnell, ComponentLink1URL=http://www.farnell.com/datasheets/2245202.pdf?src-supplier=Farnell, ComponentLink2Description=http://www.microchip.com/mymicrochip/filehandler.aspx?ddocname=en579989&src-supplier=Digi-Key, ComponentLink2URL=http://www.microchip.com/mymicrochip/filehandler.aspx?ddocname=en579989&src-supplier=Digi-Key, ComponentLink3Description=http://www.farnell.com/datasheets/1692673.pdf?src-supplier=Element14, ComponentLink3URL=http://www.farnell.com/datasheets/1692673.pdf?src-supplier=Element14, Pricing 1="1 = 0,34000, 25 = 0,28000, 100 = 0,26000 (USD)", RoHS=Yes, Stock 1=9885, Supplier 1=Digi-Key
IC2: library part "ST  LD39200PUR", "Integrated Circuit", Case/Package=DFN, Dropout Voltage=250mV, Manufacturer=STMicroelectronics, Manufacturer Part Number=LD39200PUR, Max Input Voltage=6V, Max Operating Temperature=125°C, Max Output Voltage=5.75V, Max Supply Current=3mA, Min Operating Temperature=-40°C, Min Output Voltage=500mV, Output Current=2A, Power Supply Rejection Ratio (PSRR)=40dB, Quiescent Current=300uA, Supplier Part Number 1=497-17110-1-ND, ComponentLink1Description=http://www.farnell.com/datasheets/2815831.pdf?src-supplier=Farnell, ComponentLink1URL=http://www.farnell.com/datasheets/2815831.pdf?src-supplier=Farnell, ComponentLink2Description=http://www.farnell.com/datasheets/2815831.pdf?src-supplier=Element14, ComponentLink2URL=http://www.farnell.com/datasheets/2815831.pdf?src-supplier=Element14, ComponentLink3Description=http://www.farnell.com/datasheets/2815831.pdf?src-supplier=Newark, ComponentLink3URL=http://www.farnell.com/datasheets/2815831.pdf?src-supplier=Newark, ComponentLink4Description=http://www.st.com/content/ccc/resource/technical/document/datasheet/4b/e6/2e/a4/16/04/46/9d/DM00102135.pdf/files/DM00102135.pdf/jcr:content/translations/en.DM00102135.pdf?src-supplier=Digi-Key, ComponentLink4URL=http://www.st.com/content/ccc/resource/technical/document/datasheet/4b/e6/2e/a4/16/04/46/9d/DM00102135.pdf/files/DM00102135.pdf/jcr:content/translations/en.DM00102135.pdf?src-supplier=Digi-Key, Mount="Surface Mount", Number of Regulators=1, Output Configuration=Positive, Output Type=Adjustable, Packaging="Tape and Reel", Pricing 1="1 = 0,86000, 10 = 0,77300, 25 = 0,73360, 100 = 0,56330, 250 = 0,49780, 500 = 0,47160, 1000 = 0,36680 (USD)", RoHS=No, Stock 1=2710, Supplier 1=Digi-Key
J1 J2: library part "12 Pin (10 + 2 Power) B2B Header", "Board to Board Connector", Manufacturer=Hirose, Manufacturer Part Number=BM24-10DP/2-0.35V(53), Supplier Part Number 1=H124923CT-ND, ComponentLink1Description=https://media.digikey.com/pdf/Data%20Sheets/Hirose%20PDFs/BM24.pdf?src-supplier=Digi-Key, ComponentLink1URL=https://media.digikey.com/pdf/Data%20Sheets/Hirose%20PDFs/BM24.pdf?src-supplier=Digi-Key, ComponentLink2Description=https://www.hirose.com/product/en/download_file/key_name/BM24-10DP__2-0.35V%2853%29/category/Specification%20Sheet/doc_file_id/87039/?file_category_id=9&item_id=06772001953&is_series=&src-supplier=Digi-Key, ComponentLink2URL=https://www.hirose.com/product/en/download_file/key_name/BM24-10DP__2-0.35V%2853%29/category/Specification%20Sheet/doc_file_id/87039/?file_category_id=9&item_id=06772001953&is_series=&src-supplier=Digi-Key, Contact Plating=Gold, Mated Stacking Heights=0.8mm, Mount="Surface Mount", Number of Pins=10, Number of Rows=2, Packaging="Tape and Reel", Pitch=0.014inch, Pricing 1="1 = 1,08000, 10 = 0,95400, 25 = 0,89760, 50 = 0,86020, 100 = 0,82280, 250 = 0,74800, 500 = 0,67320 (USD)", RoHS=Yes, Stock 1=2583, Supplier 1=Digi-Key
J3 J4: library part "3 Pin"
J5: library part "Mini PCIe", Flammability Rating="UL94 V-0", High Temperature Housing=Yes, Housing Color=Black, Manufacturer="TE Connectivity", Manufacturer Part Number=1775862-2, Package Quantity=550, Supplier Part Number 1=A142273CT-ND, ComponentLink1Description=http://www.farnell.com/datasheets/2645681.pdf?src-supplier=Farnell, ComponentLink1URL=http://www.farnell.com/datasheets/2645681.pdf?src-supplier=Farnell, ComponentLink2Description=http://components.arrow.com/part/dataview/0323_06583025?src-supplier=Arrow+Europe, ComponentLink2URL=http://components.arrow.com/part/dataview/0323_06583025?src-supplier=Arrow+Europe, ComponentLink3Description=http://www.onlinecomponents.com/datasheet/17758622.aspx?p=10266609&src-supplier=Onlinecomponents.com, ComponentLink3URL=http://www.onlinecomponents.com/datasheet/17758622.aspx?p=10266609&src-supplier=Onlinecomponents.com, ComponentLink4Description=http://components.arrow.com/part/dataview/47764795S8999339N5665?src-supplier=Arrow+Electronics, ComponentLink4URL=http://components.arrow.com/part/dataview/47764795S8999339N5665?src-supplier=Arrow+Electronics, ComponentLink5Description=https://www.te.com/commerce/DocumentDelivery/DDEController?Action=srchrtrv&DocNm=1775862&DocType=Customer+Drawing&DocLang=English&src-supplier=Digi-Key, ComponentLink5URL=https://www.te.com/commerce/DocumentDelivery/DDEController?Action=srchrtrv&DocNm=1775862&DocType=Customer+Drawing&DocLang=English&src-supplier=Digi-Key, ComponentLink6Description=http://www.farnell.com/datasheets/2645681.pdf?src-supplier=Element14, ComponentLink6URL=http://www.farnell.com/datasheets/2645681.pdf?src-supplier=Element14, ComponentLink7Description=https://www.te.com/commerce/DocumentDelivery/DDEController?Action=srchrtrv&amp;DocNm=1775862&amp;DocType=Customer+Drawing&amp;DocLang=English&src-supplier=Digi-Key, ComponentLink7URL=https://www.te.com/commerce/DocumentDelivery/DDEController?Action=srchrtrv&amp;DocNm=1775862&amp;DocType=Customer+Drawing&amp;DocLang=English&src-supplier=Digi-Key, ComponentLink8Description=http://www.farnell.com/datasheets/2645681.pdf?src-supplier=Newark, ComponentLink8URL=http://www.farnell.com/datasheets/2645681.pdf?src-supplier=Newark, ComponentLink9Description=http://www.te.com/commerce/DocumentDelivery/DDEController?Action=showdoc&DocId=Data+Sheet8-1773459-7_EXPRESS_MINI_CARD_QRG1011pdfEnglishENG_DS_8-1773459-7_EXPRESS_MINI_CARD_QRG_1011.pdf&src-supplier=Avnet, ComponentLink9URL=http://www.te.com/commerce/DocumentDelivery/DDEController?Action=showdoc&DocId=Data+Sheet8-1773459-7_EXPRESS_MINI_CARD_QRG1011pdfEnglishENG_DS_8-1773459-7_EXPRESS_MINI_CARD_QRG_1011.pdf&src-supplier=Avnet, ComponentLink10Description=http://www.te.com/commerce/DocumentDelivery/DDEController?Action=showdoc&DocId=Data+Sheet%7F8-1773459-7_EXPRESS_MINI_CARD_QRG%7F1011%7Fpdf%7FEnglish%7FENG_DS_8-1773459-7_EXPRESS_MINI_CARD_QRG_1011.pdf&src-supplier=Avnet+Europe, ComponentLink10URL=http://www.te.com/commerce/DocumentDelivery/DDEController?Action=showdoc&DocId=Data+Sheet%7F8-1773459-7_EXPRESS_MINI_CARD_QRG%7F1011%7Fpdf%7FEnglish%7FENG_DS_8-1773459-7_EXPRESS_MINI_CARD_QRG_1011.pdf&src-supplier=Avnet+Europe, ComponentLink11Description=http://www.te.com/commerce/DocumentDelivery/DDEController?Action=showdoc&DocId=Data+Sheet8-1773459-7_EXPRESS_MINI_CARD_QRG1011pdfEnglishENG_DS_8-1773459-7_EXPRESS_MINI_CARD_QRG_1011.pdf&src-supplier=Avnet+Asia, ComponentLink11URL=http://www.te.com/commerce/DocumentDelivery/DDEController?Action=showdoc&DocId=Data+Sheet8-1773459-7_EXPRESS_MINI_CARD_QRG1011pdfEnglishENG_DS_8-1773459-7_EXPRESS_MINI_CARD_QRG_1011.pdf&src-supplier=Avnet+Asia, Connector Type=Receptacle, Contact Material="Copper Alloy", Contact Plating=Gold, ELV=Compliant, Housing Material=Thermoplastic, Lead Free="Contains Lead", Mount="Surface Mount", Number of Contacts=52, Number of Positions=52, Number of Rows=2, Orientation="Right Angle", Packaging="Tape and Reel", PCB Mounting Orientation=Horizontal, PCB Mount Retention=Without, Pitch=0.8mm, Pricing 1="1 = 0,77000, 10 = 0,72000, 25 = 0,64840, 50 = 0,57620, 100 = 0,55230, 250 = 0,50424 (USD)", Radiation Hardening=No, RoHS=Yes, Row Spacing=0.031inch, Stackable=No, Stack Height=5.2mm, Stock 1=11289, Supplier 1=Digi-Key, Termination=Solder
J6: "Coaxial Connector with Switch", Case/Package=SMD/SMT, Dielectric Material=Polymer, Frequency=6GHz, Housing Color=Beige, Manufacturer="TE Connectivity AMP", Manufacturer Part Number=1909763-1, Max Operating Temperature=194°C, Min Operating Temperature=-40°C, Package Quantity=1, Supplier Part Number 1=A118077CT-ND, Body Material="Polymer,Liquid Crystal Polymer", Body Plating=Gold, ComponentLink1Description=https://datasheet.ciiva.com/16312/eng-cd-1909763-b-16312469.pdf?src-supplier=Future+Electronics, ComponentLink1URL=https://datasheet.ciiva.com/16312/eng-cd-1909763-b-16312469.pdf?src-supplier=Future+Electronics, ComponentLink2Description=https://datasheet.ciiva.com/16469/eng-cd-1909763-b-16469221.pdf?src-supplier=Avnet+Asia, ComponentLink2URL=https://datasheet.ciiva.com/16469/eng-cd-1909763-b-16469221.pdf?src-supplier=Avnet+Asia, ComponentLink3Description=https://datasheet.ciiva.com/9423/eng-cd-1909763-b-9423785.pdf?src-supplier=Avnet, ComponentLink3URL=https://datasheet.ciiva.com/9423/eng-cd-1909763-b-9423785.pdf?src-supplier=Avnet, ComponentLink4Description=https://datasheet.ciiva.com/29191/eng-cd-1909763-b1-basefilename-29191146.pdf?src-supplier=Digi-Key, ComponentLink4URL=https://datasheet.ciiva.com/29191/eng-cd-1909763-b1-basefilename-29191146.pdf?src-supplier=Digi-Key, ComponentLink5Description=https://datasheet.ciiva.com/29191/eng-cd-1909763-b1-basefilename-29191148.pdf?src-supplier=Digi-Key, ComponentLink5URL=https://datasheet.ciiva.com/29191/eng-cd-1909763-b1-basefilename-29191148.pdf?src-supplier=Digi-Key, Connector System=Cable-to-Board, Connector Type=Jack, Contact Material="Copper Alloy", Contact Plating=Gold, ELV=Compliant, Fastening Type=Push,Pull, Gender=Female, Impedance=50R, Insulation Material=Thermoplastic, Lead Free="Lead Free", Length=3mm, Max Frequency=6GHz, Mount=Panel, Number of Positions=1, Orientation=Straight, Packaging="Tape and Reel", Pricing 1="1 = 0,50000, 10 = 0,47200, 100 = 0,36150, 500 = 0,31436, 1000 = 0,25935 (USD)", Radiation Hardening=No, RoHS=Yes, Sealable="No (Without)", Stock 1=72730, Supplier 1=Digi-Key, Termination=SMD/SMT
J7: library part SIM8060-6-1-14-00-A, "CONN SIM NANO HINGED 6P W/SWITCH", Manufacturer="Global Connector Technology", Supplier Part Number 1=2073-SIM8060-6-1-14-00-ACT-ND, ComponentLink1Description=Datasheet, ComponentLink1URL=https://gct.co/files/drawings/sim8060.pdf, ComponentLink2Description="DigiKey Link", ComponentLink2URL=http://digikey.com/product-detail/en/gct/SIM8060-6-1-14-00-A/2073-SIM8060-6-1-14-00-ACT-ND/10127236, Manufacturer Part Number=SIM8060-6-1-14-00-A, RoHS=No, Stock 1=0, Supplier 1=Digi-Key
Q1 Q2 Q3 Q4: library part BC817, "Transistor, BC817", Current - Collector Cutoff (Max)="100nA (ICBO)", DC Current Gain (hFE) (Min) @ Ic, Vce="100 @ 100mA, 1V", Frequency - Transition=100MHz, Manufacturer="ON Semiconductor", Manufacturer Part Number=BC817-16LT1G, Operating Temperature="-65°C ~ 150°C (TJ)", Package / Case="TO-236-3, SC-59, SOT-23-3", Supplier Device Package="SOT-23-3 (TO-236)", Supplier Part Number 1=BC817-16LT1GOSCT-ND, Base Part Number=BC817, Category="Discrete Semiconductor Products", ComponentLink1Description=http://www.onsemi.com/pub/Collateral/BC817-16LT1-D.PDF, ComponentLink1URL=http://www.onsemi.com/pub/Collateral/BC817-16LT1-D.PDF, Mounting Type="Surface Mount", Packaging="Cut Tape (CT)", Part Status=Active, Price=0,13, Pricing 1="1=0.13, 10=0.118, 100=0.0642, 500=0.0395, 1000=0.02693 (USD)", RoHS="RoHS Compliant", Stock 1=46603, Supplier 1=Digi-Key, Transistor Type=NPN, Vce Saturation (Max) @ Ib, Ic="700mV @ 50mA, 500mA"
R1 R2 R3 R4 R5 R6 R7 R12 R14 R15 R17 R26 R27: library part Resistor_Chip, "Ceramic, SMT Capacitor", Case/Package=0603, Case Code (Metric)=1608, Manufacturer="Stackpole Electronics", Manufacturer Part Number=RNCP0603FTD10K0, Max Operating Temperature=155°C, Max Power Dissipation=125mW, Min Operating Temperature=-55°C, Supplier Part Number 1=RNCP0603FTD10K0CT-ND, Temperature Coefficient=100ppm/°C, Tolerance=1%, Case Code (Imperial)=0603, Composition="Thin Film", Contact Plating=Matte,Tin, Features="Anti-Sulfur,Moisture Resistant", Height=0.02inch, Lead Free="Lead Free", Length=0.059inch, Mount="Surface Mount", Number of Terminations=2, Packaging="Tape and Reel", Pricing 1="1 = 0,10000, 10 = 0,06700, 100 = 0,02730, 1000 = 0,01224, 2500 = 0,01063 (USD)", Radiation Hardening=No, Resistance=10kR, RoHS=Yes, Stock 1=183083, Supplier 1=Digi-Key, Width=0.031inch
R8 R9 R10: library part Resistor_Chip, "Ceramic, SMT Capacitor", Case/Package=0603, Case Code (Metric)=1608, Manufacturer="TE Connectivity", Manufacturer Part Number=CRGCQ0603F5K6, Max Operating Temperature=155°C, Max Power Dissipation=100mW, Min Operating Temperature=-55°C, Supplier Part Number 1=A129697CT-ND, Temperature Coefficient=100ppm/°C, Tolerance=1%, Case Code (Imperial)=0603, ComponentLink1Description=http://www.farnell.com/datasheets/2609223.pdf?src-supplier=Farnell, ComponentLink1URL=http://www.farnell.com/datasheets/2609223.pdf?src-supplier=Farnell, ComponentLink2Description=https://www.te.com/commerce/DocumentDelivery/DDEController?Action=srchrtrv&amp;DocNm=1773204-3&amp;DocType=DS&amp;DocLang=English&src-supplier=Digi-Key, ComponentLink2URL=https://www.te.com/commerce/DocumentDelivery/DDEController?Action=srchrtrv&amp;DocNm=1773204-3&amp;DocType=DS&amp;DocLang=English&src-supplier=Digi-Key, ComponentLink3Description=https://www.te.com/commerce/DocumentDelivery/DDEController?Action=srchrtrv&DocNm=1773204-3&DocType=DS&DocLang=English&src-supplier=Digi-Key, ComponentLink3URL=https://www.te.com/commerce/DocumentDelivery/DDEController?Action=srchrtrv&DocNm=1773204-3&DocType=DS&DocLang=English&src-supplier=Digi-Key, Composition="Thick Film", Features="Moisture Resistant,Automotive AEC-Q200", Number of Terminations=2, Packaging="Cut Tape", Pricing 1="1 = 0,10000, 10 = 0,03000, 100 = 0,01200, 1000 = 0,00541, 2500 = 0,00469 (USD)", Resistance=5.6kR, RoHS=No, Stock 1=37798, Supplier 1=Digi-Key
R11 R16 R24 R25: library part Resistor_Chip, "Ceramic, SMT Capacitor", Case/Package=0603, Case Code (Metric)=1608, Manufacturer=Rohm, Manufacturer Part Number=ESR03EZPJ102, Max Operating Temperature=155°C, Max Power Dissipation=250mW, Min Operating Temperature=-55°C, Package Quantity=1, Supplier Part Number 1=RHM1.0KDCT-ND, Temperature Coefficient=200ppm/°C, Tolerance=5%, Case Code (Imperial)=0603, ComponentLink1Description=https://datasheet.ciiva.com/2469/esr-2469603.pdf?src-supplier=Digi-Key, ComponentLink1URL=https://datasheet.ciiva.com/2469/esr-2469603.pdf?src-supplier=Digi-Key, ComponentLink2Description=https://datasheet.ciiva.com/2469/esr-2469604.pdf?src-supplier=Digi-Key, ComponentLink2URL=https://datasheet.ciiva.com/2469/esr-2469604.pdf?src-supplier=Digi-Key, ComponentLink3Description=https://datasheet.ciiva.com/2469/esr-2469605.pdf?src-supplier=Digi-Key, ComponentLink3URL=https://datasheet.ciiva.com/2469/esr-2469605.pdf?src-supplier=Digi-Key, Composition="Thick Film", Features="Automotive AEC-Q200", Height=0.022inch, Lead Free="Lead Free", Length=0.063inch, Number of Terminations=2, Packaging="Tape and Reel", Pricing 1="1 = 0,10000, 10 = 0,08300, 100 = 0,03180, 1000 = 0,01398, 2500 = 0,01207 (USD)", Resistance=1kR, RoHS=Yes, Stock 1=148117, Supplier 1=Digi-Key, Width=0.031inch